# Altium PCB sensors_0v3.PcbDoc
Units mm, origin at the board's own origin, x right, y up, seen from the top; angles counter-clockwise.
Board outline 50 x 100 mm, 2 copper layers (Top Layer, Bottom Layer); 69 components, 59 nets, 299 pads, 123 vias.
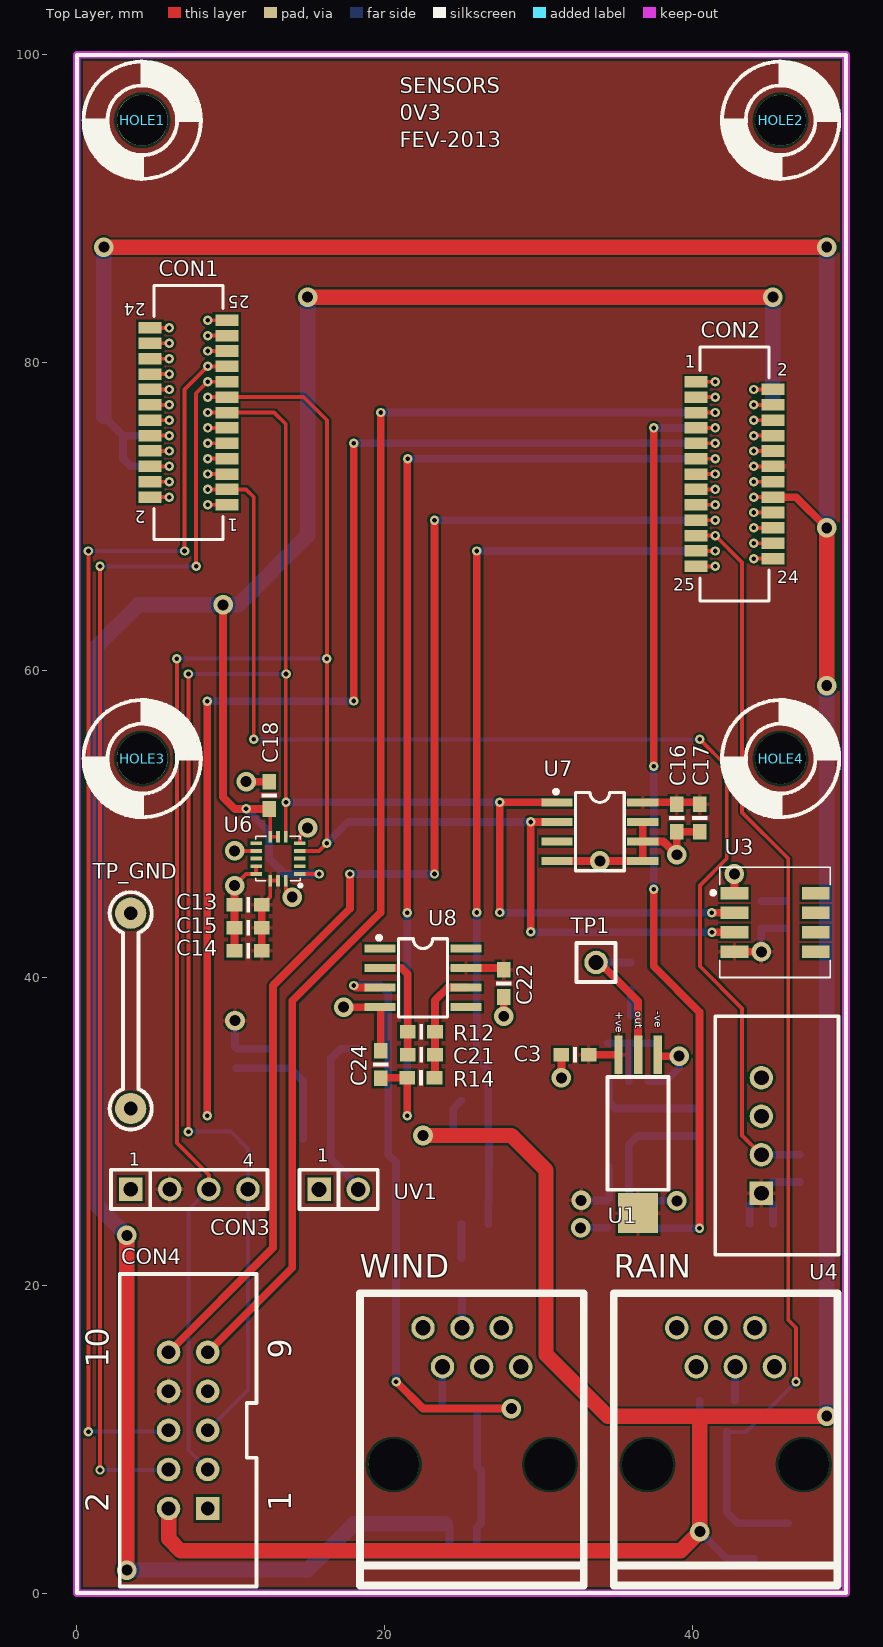
[diagram p0: Top Layer view]
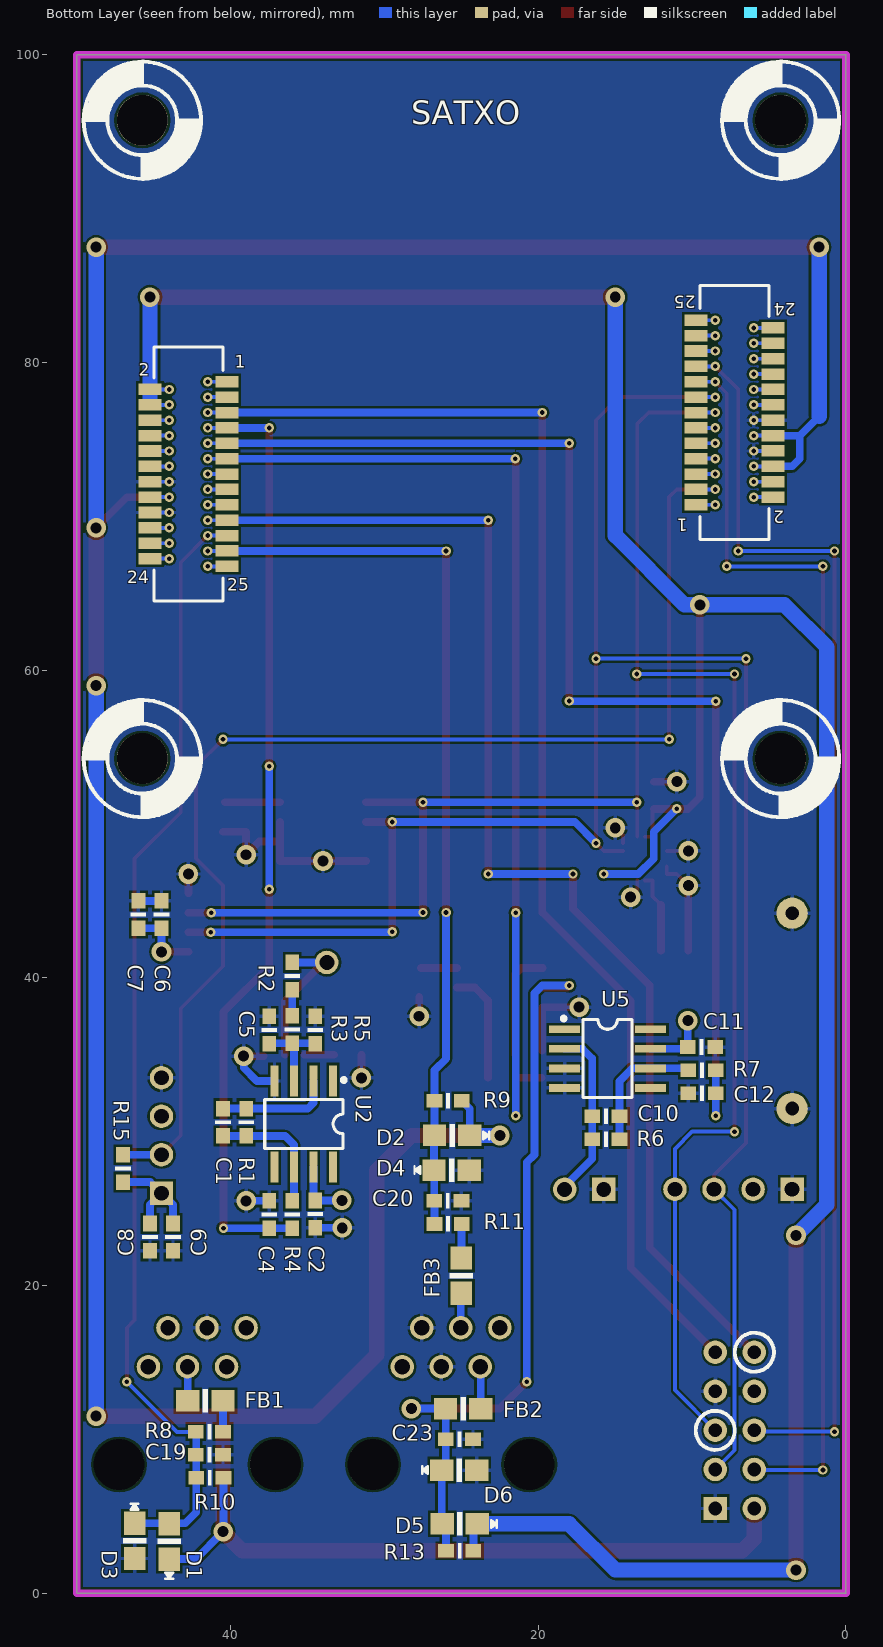
[diagram p1: Bottom Layer view, seen from below]

## Layer stack, top to bottom
Top Layer: signal copper 0.0356
Dielectric: dielectric 0.32, FR-4, Dk 4.8
Bottom Layer: signal copper 0.0356

## Board outline
0,100 0,0 50,0 50,100 0,100

## Design rules (kind name [scope] priority, off if disabled: settings)
Clearance [All] p1: gap=0.152
HoleSize [All] p1: absolutevalues=TRUE maxlimit=2.54 minlimit=0.305 maxpercent=80.000 minpercent=20.000
PolygonConnect [All] p1: connectstyle=Relief reliefconductorwidth=0.254 reliefentries=4 polygonreliefangle="90 Angle"
RoutingVias [All] p1: holewidth=0.508 width=0.762 viastyle="Through Hole" minholewidth=0.305 minwidth=0.61 maxholewidth=0.711 maxwidth=1.27
SilkscreenOverComponentPads [All] p1: minsilkscreentomaskgap=0.254
SolderMaskExpansion [All] p1: expansion=0.102
Width [All] p1: maxlimit=2.54 minlimit=0.152 preferedwidth=0.254
26 further rules are at their usual default settings.

## Classes and differential pairs
component class U_weatherstation: C19 C20 C21 C22 C23 C24 D1 D2 D3 D4 D5 D6 FB1 FB2 FB3 R8 R9 R10 R11 R12 R13 R14 RAIN U8 WIND
component class U_pressure_temp_uv: C10 C11 C12 C13 C14 C15 C16 C17 C18 R6 R7 U5 U6 U7 UV1
component class U_humidity: C1 C2 C3 C4 C5 C6 C7 C8 C9 R1 R2 R3 R4 R5 R15 TP1 U1 U2 U3 U4
component class U_connectors: CON1 CON2 CON3 CON4 HOLE1 HOLE2 HOLE3 HOLE4 TP_GND

## Components (designator, comment, footprint, x,y, rotation, side; value= is the part's Value field where it differs from the comment)
C1 "100pF" 0603 40.5,31.5 r270 bottom
C2 "100nF" 0603 34.5,23.75 r90 bottom
C3 "100nF" 0603 31.5,35 r0 top
C4 "100nF" 0603 37.5,25.5 r270 bottom
C5 "100nF" 0603 37.5,37.5 r270 bottom
C6 "100nF" 0603 44.5,45 r270 bottom
C7 "10nF" 0603 46,45 r270 bottom
C8 "100nF" 0603 45.25,22.25 r90 bottom
C9 "10nF" 0603 43.75,22.25 r90 bottom
C10 "100pF" 0603 16.5,31 r180 bottom
C11 "100nF" 0603 8.5,35.5 r0 bottom
C12 "100nF" 0603 10.25,32.5 r180 bottom
C13 "10nF" 0603 10.25,44.75 r0 top
C14 "1uF" 0603 10.25,41.75 r0 top
C15 "100nF" 0603 10.25,43.25 r0 top
C16 "100nF" 0603 39,49.5 r90 top
C17 "10nF" 0603 40.5,49.5 r90 top
C18 "100nF" 0603 12.5,52.75 r270 top
C19 "10nF" 0603 40.5,9 r0 bottom
C20 "10nF" 0603 25,25.5 r0 bottom
C21 "100pF" 0603 21.5,35 r0 top
C22 "100nF" 0603 27.75,38.75 r90 top
C23 "100pF" 0603 24.25,10 r0 bottom
C24 "100nF" 0603 19.75,35.25 r270 top
CON1 "25P" DF9-25-STACK#1 9.751,70.75 r180 top
CON2 "25P" DF9-25-STACK#2 40.249,78.75 r0 top
CON3 "4P" SIP-4 3.5,26.25 r0 top
CON4 "10P" IDC-10 8.5,5.5 r90 top
D1 "MCL4148" 0805@DIODE 44,4.5 r270 bottom
D2 "MCL4148" 0805@DIODE 26.75,29.75 r180 bottom
D3 "MCL4148" 0805@DIODE 46.25,2.25 r90 bottom
D4 "MCL4148" 0805@DIODE 24.5,27.5 r0 bottom
D5 "MCL4148" 0805@DIODE 26.25,4.5 r180 bottom
D6 "MCL4148" 0805@DIODE 24,8 r0 bottom
FB1 "150Z_100MHz" 0805 40.5,12.5 r0 bottom
FB2 "150Z_100MHz" 0805 23.75,12 r0 bottom
FB3 "150Z_100MHz" 0805 25,19.5 r90 bottom
HOLE1 "HOLE" NPTH-3MM 4.25,95.75 r0 top
HOLE2 "HOLE" NPTH-3MM 45.75,95.75 r0 top
HOLE3 "HOLE" NPTH-3MM 4.25,54.25 r0 top
HOLE4 "HOLE" NPTH-3MM 45.75,54.25 r0 top
R1 "10K" 0603 39,31.5 r270 bottom
R2 "20K" 0603 36,41 r270 bottom
R3 "20K" 0603 36,35.75 r90 bottom
R4 "300R" 0603 36,25.5 r270 bottom
R5 "20K" 0603 34.5,37.5 r270 bottom
R6 "300R" 0603 16.5,29.5 r180 bottom
R7 "300R" 0603 10.25,34 r180 bottom
R8 "200R" 0603 40.5,10.5 r0 bottom
R9 "10K" 0603 26.75,32 r180 bottom
R10 "10K" 0603 42.25,7.5 r180 bottom
R11 "200R" 0603 26.75,24 r180 bottom
R12 "10K" 0603 21.5,36.5 r0 top
R13 "220K" 0603 26,2.75 r180 bottom
R14 "300R" 0603 23.25,33.5 r180 top
R15 "2.2k" 0603 47,28.5 r270 bottom
RAIN "RJ25" RJ25 39,17.25 r0 top
TP1 "Test Point" TERMINAL 33.75,41 r0 top
TP_GND "Test Point" TEST-PROBE2 3.5,31.5 r90 top
U1 "HIH-5031" HIH 37.75,35 r180 top
U2 "MCP6071" SOIC-8 35.25,30.5 r270 bottom
U3 "SHT11" SHT 42.75,45.5 r0 top
U4 "DHT22" DHT22 44.5,26 r90 top
U5 "MCP6V26" SOIC-8 15.5,34.75 r180 bottom
U6 "LPS331AP" HCLGA-16 14.5,46.75 r180 top
U7 "TMP175" SOIC-8 34,49.5 r0 top
U8 "MCP6071" SOIC-8 22.5,40 r0 top
UV1 "2P" SIP-2 15.75,26.25 r0 top
WIND "RJ25" RJ25 22.5,17.25 r0 top

## Footprints (in the part's own frame and the unit in brackets; to place one, negate y for a bottom-side part, rotate by r counter-clockwise, add the part's x,y. Pads: shape width x height; smd on the part's side, far side on the other; paste and mask are expansions set on the pad)
0603 [mil]
  rect 40x35 smd: 1(0,0) 2(70,0)
  silkscreen extent 30,-20 40,20
0805 [mil]
  rect 60x55 smd: 1(0,0) 2(90,0)
  silkscreen extent 38,-30 52,30
0805@DIODE [mil]
  rect 60x55 smd: A(0,0) K(90,0)
  silkscreen extent 38,-30 140,30
DF9-25-STACK#1 [mm] "Hirose DF9 25P CON - STACKED"
  rect 1.5x0.75 smd: 1(0,0) 2(5,-0.5) 3(0,-1) 4(5,-1.5) 5(0,-2) 6(5,-2.5) 7(0,-3) 8(5,-3.5) 9(0,-4) 10(5,-4.5) 11(0,-5) 12(5,-5.5) 13(0,-6) 14(5,-6.5) 15(0,-7) 16(5,-7.5) 17(0,-8) 18(5,-8.5) 19(0,-9) 20(5,-9.5) 21(0,-10) 22(5,-10.5) 23(0,-11) 24(5,-11.5) 25(0,-12)
  rect 1.5x0.75 smd far side: 1(0,0) 2(5,-0.5) 3(0,-1) 4(5,-1.5) 5(0,-2) 6(5,-2.5) 7(0,-3) 8(5,-3.5) 9(0,-4) 10(5,-4.5) 11(0,-5) 12(5,-5.5) 13(0,-6) 14(5,-6.5) 15(0,-7) 16(5,-7.5) 17(0,-8) 18(5,-8.5) 19(0,-9) 20(5,-9.5) 21(0,-10) 22(5,-10.5) 23(0,-11) 24(5,-11.5) 25(0,-12)
  Top Layer lines w0.25: 5,-0.5 3.75,-0.5 ; 5,-1.5 3.75,-1.5 ; 5,-2.5 3.75,-2.5 ; 5,-3.5 3.75,-3.5 ; 5,-4.5 3.75,-4.5 ; 5,-5.5 3.75,-5.5 ; 5,-6.5 3.75,-6.5 ; 5,-7.5 3.75,-7.5 ; 5,-8.5 3.75,-8.5 ; 5,-9.5 3.75,-9.5 ; 5,-10.5 3.75,-10.5 ; 5,-11.5 3.75,-11.5 ; 1.25,0 0,0 ; 1.25,-1 0,-1 ; 1.25,-2 0,-2 ; 1.25,-3 0,-3 ; 1.25,-4 0,-4 ; 1.25,-5 0,-5 ; 1.25,-6 0,-6 ; 1.25,-7 0,-7 ; 1.25,-8 0,-8 ; 1.25,-9 0,-9 ; 1.25,-10 0,-10 ; 1.25,-11 0,-11 ; 1.25,-12 0,-12
  Bottom Layer lines w0.25: 5,-0.5 3.751,-0.5 ; 5,-1.5 3.75,-1.5 ; 5,-2.5 3.75,-2.5 ; 5,-3.5 3.75,-3.5 ; 5,-4.5 3.75,-4.5 ; 5,-5.5 3.75,-5.5 ; 5,-6.5 3.75,-6.5 ; 5,-7.5 3.75,-7.5 ; 5,-8.5 3.75,-8.5 ; 5,-9.5 3.75,-9.5 ; 5,-10.5 3.75,-10.5 ; 5,-11.5 3.75,-11.5 ; 1.25,0 0,0 ; 1.25,-1 0,-1 ; 1.25,-2 0,-2 ; 1.25,-3 0,-3 ; 1.25,-4 0,-4 ; 1.25,-5 0,-5 ; 1.25,-6 0,-6 ; 1.25,-7 0,-7 ; 1.25,-8 0,-8 ; 1.25,-9 0,-9 ; 1.25,-10 0,-10 ; 1.25,-11 0,-11 ; 1.25,-12 0,-12 ; 3.751,-0.5 3.75,-0.5
  silkscreen extent 0.25,-14.25 4.75,2.25
DF9-25-STACK#2 [mm] "Hirose DF9 25P CON - STACKED"
  rect 1.5x0.75 smd: 1(0,0) 2(5,-0.5) 3(0,-1) 4(5,-1.5) 5(0,-2) 6(5,-2.5) 7(0,-3) 8(5,-3.5) 9(0,-4) 10(5,-4.5) 11(0,-5) 12(5,-5.5) 13(0,-6) 14(5,-6.5) 15(0,-7) 16(5,-7.5) 17(0,-8) 18(5,-8.5) 19(0,-9) 20(5,-9.5) 21(0,-10) 22(5,-10.5) 23(0,-11) 24(5,-11.5) 25(0,-12)
  rect 1.5x0.75 smd far side: 1(0,0) 2(5,-0.5) 3(0,-1) 4(5,-1.5) 5(0,-2) 6(5,-2.5) 7(0,-3) 8(5,-3.5) 9(0,-4) 10(5,-4.5) 11(0,-5) 12(5,-5.5) 13(0,-6) 14(5,-6.5) 15(0,-7) 16(5,-7.5) 17(0,-8) 18(5,-8.5) 19(0,-9) 20(5,-9.5) 21(0,-10) 22(5,-10.5) 23(0,-11) 24(5,-11.5) 25(0,-12)
  Top Layer lines w0.25: 0,-12 1.25,-12 ; 0,-11 1.25,-11 ; 0,-10 1.25,-10 ; 0,-9 1.25,-9 ; 0,-8 1.25,-8 ; 0,-7 1.25,-7 ; 0,-6 1.25,-6 ; 0,-5 1.25,-5 ; 0,-4 1.25,-4 ; 0,-3 1.25,-3 ; 0,-2 1.25,-2 ; 0,-1 1.25,-1 ; 0,0 1.25,0 ; 3.75,-11.5 5,-11.5 ; 3.75,-10.5 5,-10.5 ; 3.75,-9.5 5,-9.5 ; 3.75,-8.5 5,-8.5 ; 3.75,-7.5 5,-7.5 ; 3.75,-6.5 5,-6.5 ; 3.75,-5.5 5,-5.5 ; 3.75,-4.5 5,-4.5 ; 3.75,-3.5 5,-3.5 ; 3.75,-2.5 5,-2.5 ; 3.75,-1.5 5,-1.5 ; 3.75,-0.5 5,-0.5
  Bottom Layer lines w0.25: 0,-12 1.25,-12 ; 0,-11 1.25,-11 ; 0,-10 1.25,-10 ; 0,-9 1.25,-9 ; 0,-8 1.25,-8 ; 0,-7 1.25,-7 ; 0,-6 1.25,-6 ; 0,-5 1.25,-5 ; 0,-4 1.25,-4 ; 0,-3 1.25,-3 ; 0,-2 1.25,-2 ; 0,-1 1.25,-1 ; 0,0 1.25,0 ; 3.75,-11.5 5,-11.5 ; 3.75,-10.5 5,-10.5 ; 3.75,-9.5 5,-9.5 ; 3.75,-8.5 5,-8.5 ; 3.75,-7.5 5,-7.5 ; 3.75,-6.5 5,-6.5 ; 3.75,-5.5 5,-5.5 ; 3.75,-4.5 5,-4.5 ; 3.75,-3.5 5,-3.5 ; 3.75,-2.5 5,-2.5 ; 3.75,-1.5 5,-1.5 ; 3.75,-0.5 5,-0.5
  silkscreen extent 0.25,-14.25 4.75,2.25
DHT22 [mil] "DHT22 humidity sensor footprint"
  rect 60x60 hole 38: 1(0,0)
  round 60 hole 38: 2(98.43,0) 3(196.85,0) 4(295.28,0)
  silkscreen extent -157,-197 453,118
HCLGA-16 [mm]
  rect 0.75x0.25 smd: 1(0,0) 2(0,-0.5) 3(0,-1) 4(0,-1.5) 5(0,-2) 9(2.85,-2) 10(2.85,-1.5) 11(2.85,-1) 12(2.85,-0.5) 13(2.85,0)
  rect 0.25x0.75 smd: 6(0.925,-2.425) 7(1.425,-2.425) 8(1.925,-2.425) 14(1.925,0.425) 15(1.425,0.425) 16(0.925,0.425)
  silkscreen extent -0.13,-2.45 2.88,0.85
HIH [mm] "Honeywell Humidity Sensor"
  rect 0.55x2.5 smd: 1(0,0) 2(1.27,0) 3(2.54,0)
  rect 2.6x2.6 smd: PAD(1.27,10.3)
  silkscreen extent -0.7,1.45 3.25,8.77
IDC-10 [mil]
  rect 60x60 hole 35: 1(0,0)
  round 60 hole 35: 2(0,100) 3(100,0) 4(100,100) 5(200,0) 6(200,100) 7(300,0) 8(300,100) 9(400,0) 10(400,100)
  silkscreen extent -200,-125 600,225
NPTH-3MM [mil]
  round 130 hole 130 unplated: 1(0,0)
  silkscreen extent -150,-150 150,150
RJ25 [mm]
  round 1.524 hole 1: 1(0,0) 2(1.27,-2.54) 3(2.54,0) 4(3.81,-2.54) 5(5.08,0) 6(6.35,-2.54)
  round 3.25 hole 3.3: ""(-1.905,-8.89) ""(8.255,-8.89)
  silkscreen extent -4.1,-16.76 10.45,2.24
SHT [mm] "Sensirion SHTx Humidity Sensor Footprint"
  rect 1.8x0.8 smd: 1(0,0.005) 2(0,-1.27) 3(0,-2.54) 4(0,-3.81) 5(5.28,-3.81) 6(5.28,-2.54) 7(5.28,-1.27) 8(5.28,0.005)
  silkscreen extent -1.51,-5.48 6.23,1.68
SIP-2 [mil]
  rect 60x60 hole 38: 1(0,0)
  round 60 hole 38: 2(100,0)
  silkscreen extent -50,-50 150,50
SIP-4 [mil]
  rect 60x60 hole 38: 1(0,0)
  round 60 hole 38: 2(100,0) 3(200,0) 4(300,0)
  silkscreen extent -50,-50 350,50
SOIC-8 [mil] "Small Outline 8 leads Body Size 150mils"
  rect 80x20 smd: 1(-110,75) 2(-110,25) 3(-110,-25) 4(-110,-75) 5(110,-75) 6(110,-25) 7(110,25) 8(110,75)
  silkscreen extent -117,-100 63,107
TERMINAL [mil]
  round 60 hole 37.99: 1(0,0)
  silkscreen extent -50,-50 50,50
TEST-PROBE2 [mil]
  round 80 hole 35: 1(0,0) 1(500,0)
  silkscreen extent -54,-54 554,54

## Part data
C1 C2 C3 C4 C5 C6 C7 C8 C9 C10 C11 C12 C13 C14 C15 C16 C17 C18 C19 C20 C21 C22 C23 C24: library part CAP, "Capacitor"
CON1 CON2: library part CON25, "Connector 25 Pins"
CON3: library part CON04, "Connector 4 pins"
CON4: library part CON10, "Connector 10 Pins"
D1 D2 D3 D4 D5 D6: library part Diode, "Vishay Standard Avalanche Sinterglass Diode"
FB1 FB2 FB3: library part FERRITE-BEAD-AXIAL, "Ferrite bead"
HOLE1 HOLE2 HOLE3 HOLE4: library part "PCB HOLE", "PCB Fixation Hole M3"
R1 R2 R3 R4 R5 R6 R7 R8 R9 R10 R11 R12 R13 R14 R15: library part RES, "Resistor"
RAIN WIND: "RJ25 Connector"
TP1 TP_GND: library part TEST-PROBE, "Test/Probe Point"
U1: "Low Voltage Humidity Sensor"
U2 U8: library part MCP6V26, "Low-Offset Opamp"
U3 U4: "Digital Humidity and Temperature Sensor"
U5: "Low-Offset Opamp"
U6: "Pressure sensor, 260 - 1260 mbar"
U7: "Digital Temperature Sensor"
UV1: library part JMP2, "2-pin Jumper"

## Via types
v1: diameter 0.61, hole 0.305, Top Layer to Bottom Layer, 93 vias
v2: diameter 1.27, hole 0.711, Top Layer to Bottom Layer, 30 vias

## Nets (pads, with @x,y where several pads share a name; then routed paths per layer and width w, separated by ;. In a path a pad name is that pad's centre, name@x,y a point inside that pad or via, vN(x,y) a via of type N, cw(c..) or ccw(c..) an arc to the next point about the centre after c; other vN are vias at no path point)
1WIRE: CON1.3 R15.1 U4.2 | length 79.3
  Top Layer w0.25: CON1.3@9.751,71.75 11,71.75 11.5,71.25 v1(11.5,55.5) ; v1(40.5,55.5) 42.25,53.75 42.25,47.75 40.5,46 40.5,40.75 43.25,38 43.25,29.75 U4.2
  Bottom Layer w0.25: v1(11.5,55.5) v1(40.5,55.5)
  Bottom Layer w0.5: U4.2 R15.1@47,28.5
  other v1: 8.501,71.75
1WIRE_SN: CON1.1
  other v1: 8.501,70.75
A3V3: C2.2 C3.2 C6.2 C7.2 C8.2 C9.2 C11.2 C13.2 C14.2 C15.2 C16.2 C17.2 C22.2 CON2.12 CON3.2 CON4.8 R15.2 U1.3 U1.PAD U2.7 U3.4 U4.1 U5.7 U6.14 U6.15 U7.8 U8.7 | length 33.1
  Top Layer w0.25: C13.2 12.575,45.298 U6.14 U6.15
  Top Layer w0.5: C14.2 C13.2 ; U8.7 C22.2@27.643,40.635 ; C3.2 U1.3 ; U7.8 C17.2@40.373,51.405 ; U3.4 v2(44.5,41.69)
  Bottom Layer w0.5: C11.2 v2(10.278,37.222) ; C11.2@10.393,35.385 U5.7 ; v2(32.778,25.528) C2.2 ; C2.2@34.615,25.643 U2.7 ; C9.2 43.75,25.25 U4.1 ; v2@44.5,41.69 C6.2 C7.2 ; C8.2 45.25,25.25 U4.1 ; R15.2 45.222,26.722 U4.1
  other v1: 43.999,73.25
D3V3: CON1.6 CON1.10 CON2.16 CON4.2 D1.K D2.K R9.2 R10.2 | length 243.2
  Top Layer w0.5: CON2.16@45.249,71.25 46.75,71.25 v2(48.75,69.25)
  Top Layer w1: v2(1.75,87.5) v2(48.75,87.5) ; CON4.2 5.96,3.54 6.75,2.75 39.25,2.75 v2(40.5,4) 40.5,11.5 ; v2(22.5,29.75) 28.25,29.75 30.5,27.5 30.5,15.5 34.5,11.5 40.5,11.5 ; v2(48.75,11.5) 40.5,11.5 ; v2(48.75,59) v2(48.75,69.25)
  Bottom Layer w0.5: 1.75,76.5 3,75.25 ; CON1.6@4.751,73.25 3.5,73.25 3,73.75 3,75.25 ; CON1.10@4.751,75.25 3,75.25 ; D2.K 24.464,31.492 R9.2 ; R10.2 40.472,4.028 v2(40.5,4) 42.286,2.214 D1.K
  Bottom Layer w1: 1.75,76.5 v2(1.75,87.5) ; v2(22.5,29.75) D2.K ; v2(48.75,11.5) v2(48.75,59) ; v2(48.75,69.25) v2(48.75,87.5)
  other v1: 43.999,71.25 6.001,73.25 6.001,75.25
EXP_ADC: CON2.5 CON4.9 | length 86.2
  Top Layer w0.5: CON4.9 14,21.16 14,38.5 19.75,44.25 v1(19.75,76.75)
  Bottom Layer w0.5: v1(19.75,76.75) CON2.5@40.249,76.75
  other v1: 41.499,76.75
EXP_GPIO1: CON1.19 CON4.6 | length 81.3
  Top Layer w0.25: v1(0.75,10.5) v1(0.75,67.75) ; v1(7,67.75) 7,78.249 v1(8.501,79.75)
  Bottom Layer w0.25: v1(0.75,10.5) CON4.6@5.88,10.5 ; v1(0.75,67.75) v1(7,67.75)
EXP_GPIO2: CON1.17 CON4.4 | length 81.7
  Top Layer w0.25: v1(1.5,8) v1(1.5,66.75) ; v1(7.75,66.75) 7.75,77.999 v1(8.501,78.75)
  Bottom Layer w0.25: v1(1.5,8) CON4.4@5.92,8 ; v1(1.5,66.75) v1(7.75,66.75)
EXP_INT: CON2.19 CON4.10 | length 81.5
  Top Layer w0.5: CON4.10 12.75,22.45 12.75,39.5 17.75,44.5 v1(17.75,46.75) ; v1(23.25,46.75) v1(23.25,69.75)
  Bottom Layer w0.5: v1(17.75,46.75) v1(23.25,46.75) ; v1(23.25,69.75) CON2.19@40.249,69.75
  other v1: 41.499,69.75
GND: C2.1 C3.1 C4.1 C5.1 C6.1 C7.1 C8.1 C9.1 C11.1 C12.1 C13.1 C14.1 C15.1 C16.1 C17.1 C18.1 C19.1 C20.1 C22.1 C23.1 C24.1 CON1.8 CON1.12 CON2.14 CON2.18 CON3.1 CON4.1 CON4.7 D3.A D4.A D6.A R5.1 RAIN.3 TP_GND.1 U1.1 U2.4 U3.1 U4.4 U5.3 U5.4 U6.5 U6.10 U6.12 U6.13 U6.16 U7.4 U7.5 U7.6 U7.7 U8.4 UV1.1 WIND.4 WIND.5 | length 43.8
  Top Layer w0.25: v2(10.25,46) 11,46.75 U6.13 U6.12 ; v2(10.25,48.25) U6.10 ; U6.16 13.575,45.675 v2(14,45.25) ; U6.5 14.5,49.25 v2(15,49.75)
  Top Layer w0.5: C14.1 C15.1 C13.1 v2(10.25,46) ; v2(11,52.75) C18.1 ; v2(17.345,38.095) U8.4 ; C24.1 U8.4@19.75,38.05 ; v2(27.75,37.5) C22.1 ; U7.4 v2(34,47.595) U7.5 U7.6 ; v2(31.5,33.5) C3.1 ; U7.7 U7.6 ; U1.1@37.845,34.905 v2(39.155,34.905) ; C17.1 C16.1 v2(39,48) 38.135,48.865 U7.6 ; U3.1 v2(42.75,46.75)
  Bottom Layer w0.5: v2(32.75,23.75) C2.1 ; U2.4 38.294,33.294 39.155,34.155 v2(39.155,34.905) ; C4.1 v2(39,25.5) ; C6.1 C7.1
  other v1: 43.999,70.25 43.999,72.25 6.001,74.25 6.001,76.25
IO3V3: C18.2 CON2.2 CON2.4 D5.K R13.2 U6.1 U6.7 U6.8 | length 180.4
  Top Layer w0.25: C18.2@12.575,50.897 U6.8 U6.7 ; U6.1 v1(15.75,46.75)
  Top Layer w0.5: v2(9.5,64.25) 9.5,51.75 10.278,50.972 C18.2
  Top Layer w1: v2(3.25,1.5) v2(3.25,23.25) ; v2(15,84.25) v2(45.25,84.25)
  Bottom Layer w0.5: v1(11,51) 12.5,49.5 12.5,47.75 13.5,46.75 v1(15.75,46.75) ; R13.2 D5.K@24.222,4.242
  Bottom Layer w1: v2(3.25,1.5) 15,1.5 18,4.5 D5.K ; v2(3.25,23.25) 1.25,25.25 1.25,61.5 4,64.25 v2(9.5,64.25) 10.5,64.25 15,68.75 v2(15,84.25) ; CON2.4@45.25,77.5 v2(45.25,84.25)
  other v1: 43.999,77.25 43.999,78.25
NetC1_1: C1.1 R1.1 U2.2 | length 7.5
  Bottom Layer w0.5: U2.2 34.615,31.885 35,31.5 C1.1
NetC1_2: C1.2 R1.2 R4.1 U2.6 | length 8.5
  Bottom Layer w0.5: R4.1 35.885,25.615 U2.6 35.885,29.135 36.472,29.722 C1.2
NetC4_2: C4.2 CON2.7 R4.2 | length 60.5
  Top Layer w0.5: v1(37.5,45.75) 37.5,40.75 40.472,37.778 v1(40.472,23.722) ; v1(37.5,53.75) v1(37.5,75.75)
  Bottom Layer w0.5: R4.2 C4.2 v1(40.472,23.722) ; v1(37.5,45.75) v1(37.5,53.75) ; v1(37.5,75.75) CON2.7@40.249,75.75
  other v1: 41.499,75.75
NetC5_2: C5.2 R3.1 R5.2 U2.3 | length 5.3
  Bottom Layer w0.5: R5.2@34.528,35.75 R3.1 C5.2@37.473,35.75 ; U2.3 R3.1@35.885,35.635
NetC10_1: C10.1 R6.1 U5.2 UV1.2 | length 11.3
  Bottom Layer w0.5: UV1.2 18.29,26.46 16.5,28.25 R6.1 16.5,34.75 17.135,35.385 U5.2
NetC10_2: C10.2 R6.2 R7.1 U5.6 | length 8.5
  Bottom Layer w0.5: R7.1@10.365,34.115 U5.6 13.885,34.115 14.722,33.278 R6.2
NetC12_2: C12.2 CON2.9 R7.2 | length 78.4
  Top Layer w0.5: v1(8.472,31.028) v1(8.472,57.972) ; v1(18,58) v1(18,74.75)
  Bottom Layer w0.5: v1(8.472,31.028) C12.2 R7.2 ; v1(8.472,57.972) v1@17.972,57.972 ; v1(18,74.75) CON2.9@40.249,74.75
  other v1: 41.499,74.75
NetC19_2: C19.2 CON2.21 D1.A D3.K R8.2 R10.1 | length 72.5
  Top Layer w0.25: v1(41.499,68.75) 43.25,66.999 43.25,50.75 46.25,47.75 46.25,17.75 46.75,17.25 v1(46.75,13.75)
  Bottom Layer w0.25: R8.2@42.25,10.473 43.5,10.473 v1@46.75,13.723
  Bottom Layer w0.5: R8.2@42.25,10.473 R10.1 42.25,5.25 42.964,4.536 D3.K
NetC20_2: C20.2 CON2.23 D2.A D4.K R9.1 R11.1 | length 58.3
  Top Layer w0.5: v1(26,44.25) v1(26,67.75)
  Bottom Layer w0.5: v1(26,44.25) 26,34.75 26.75,34 R9.1 D2.A ; v1(26,67.75) CON2.23@40.249,67.75 ; R11.1 26.75,25.472 C20.2 D4.K@26.778,27.492 ; D4.K D2.A@26.786,29.715
  other v1: 41.499,67.75
NetC21_1: C21.1 R12.1 U8.2 | length 7.2
  Top Layer w0.5: U8.2 21.115,40.635 21.5,40.25 C21.1
NetC21_2: C21.2 R12.2 R14.1 U8.6 | length 7.4
  Top Layer w0.5: R14.1@23.278,33.5 23.278,38.528 24.115,39.365 U8.6
NetC23_2: C23.2 D5.A D6.K FB2.2 R13.1 U8.3 | length 49.6
  Top Layer w0.5: v1(18,39.5) 18.135,39.365 U8.3 ; v1(20.75,13.75) 22.5,12 v2(28.25,12)
  Bottom Layer w0.5: v1(18,39.5) 19.75,39.5 20.25,39 20.25,28.5 20.75,28 v1(20.75,13.75) ; R13.1 26,4.25 D5.A 26.286,4.536 D6.K 26.028,8.258 C23.2 FB2.2@26.028,11.992 ; FB2.2 v2(28.25,12)
NetC24_2: C24.2 CON2.11 R14.2 | length 65.6
  Top Layer w0.5: C24.2@19.778,33.5 R14.2 v1(21.472,31.028) ; v1(21.472,44.222) v1@21.472,73.722
  Bottom Layer w0.5: v1(21.472,31.028) v1(21.472,44.222) ; v1(21.5,73.75) CON2.11@40.249,73.75
  other v1: 41.499,73.75
NetFB1_1: FB1.1 R8.1 | length 2
  Bottom Layer w0.5: R8.1 FB1.1@40.5,12.5
NetFB1_2: FB1.2 RAIN.4 | length 2.2
  Bottom Layer w0.5: FB1.2 RAIN.4@42.786,14.686
NetFB2_1: FB2.1 WIND.2 | length 2.7
  Bottom Layer w0.5: FB2.1 WIND.2@23.75,14.69
NetFB3_1: FB3.1 WIND.3 | length 2.2
  Bottom Layer w0.5: WIND.3 FB3.1@25.04,19.461
NetFB3_2: FB3.2 R11.2 | length 2.2
  Bottom Layer w0.5: FB3.2 R11.2@25,23.972
NetR2_1: R2.1 TP1.1 U1.2 | length 9.5
  Top Layer w0.5: TP1.1 33.961,41 36.48,38.481 U1.2
  Bottom Layer w0.5: TP1.1 R2.1
NetR2_2: R2.2 R3.2 | length 1.7
  Bottom Layer w0.5: R3.2 R2.2
PB0: CON1.4
  other v1: 6.001,72.25
PB4: CON1.2
  other v1: 6.001,71.25
PD4: CON1.7
  other v1: 8.501,73.75
PD5: CON1.5
  other v1: 8.501,72.75
PE2: CON2.20
  other v1: 43.999,69.25
PE3: CON2.25
  other v1: 41.499,66.75
PE7: CON2.17
  other v1: 41.499,70.75
PF0: CON2.15
  other v1: 41.499,71.75
PF1: CON2.13
  other v1: 41.499,72.75
PF6: CON2.3
  other v1: 41.499,77.75
PF7: CON2.1
  other v1: 41.499,78.75
PG0: CON1.23
  other v1: 8.501,81.75
PG1: CON1.21
  other v1: 8.501,80.75
RSTZ: CON1.25
  other v1: 8.501,82.75
SCL: CON1.15 CON3.3 CON4.3 U3.3 U6.4 U7.2 | length 136.9
  Top Layer w0.25: v1(6.5,60.75) 6.5,29.25 8.58,27.17 CON3.3 ; CON1.15@9.751,77.75 14.75,77.75 16.25,76.25 v1(16.25,60.75) v1(16.25,48.75) 15.75,48.25 U6.4
  Top Layer w0.5: v1(29.5,43) v1(29.5,50.135) U7.2 ; v1(41.29,42.96) U3.3
  Bottom Layer w0.25: v1(6.5,60.75) v1(16.25,60.75) ; CON4.3 7.25,9.29 7.25,24.92 CON3.3
  Bottom Layer w0.5: v1(16.25,48.75) 17.635,50.135 v1(29.5,50.135) ; v1@29.5,42.96 v1(41.29,42.96)
  other v1: 8.501,77.75
SDA: CON1.13 CON3.4 CON4.5 U3.2 U6.6 U7.1 | length 130.8
  Top Layer w0.25: v1(7.25,30) v1(7.25,59.75) ; CON1.13@9.751,76.75 12.825,76.75 13.575,76 U6.6
  Top Layer w0.5: v1(27.5,44.25) v1(27.5,51.405) U7.1 ; v1(41.27,44.23) U3.2
  Bottom Layer w0.25: v1(7.25,30) 10,30 11.12,28.88 CON3.4 11.12,13.2 CON4.5 ; v1(7.25,59.75) v1(13.6,59.75)
  Bottom Layer w0.5: v1(13.595,51.405) v1(27.5,51.405) ; v1(27.5,44.25) 27.52,44.23 v1(41.27,44.23)
  other v1: 8.501,76.75
STACK_BUS1: CON1.14
  other v1: 6.001,77.25
STACK_BUS2: CON1.16
  other v1: 6.001,78.25
STACK_BUS3: CON1.18
  other v1: 6.001,79.25
STACK_BUS4: CON1.20
  other v1: 6.001,80.25
STACK_BUS5: CON1.22
  other v1: 6.001,81.25
STACK_BUS6: CON1.24
  other v1: 6.001,82.25
STACK_BUS9: CON2.6
  other v1: 43.999,76.25
STACK_BUS10: CON2.8
  other v1: 43.999,75.25
STACK_BUS11: CON2.10
  other v1: 43.999,74.25
UART0_RX: CON2.24
  other v1: 43.999,67.25
UART0_TX: CON2.22
  other v1: 43.999,68.25
UART1_RX: CON1.11
  other v1: 8.501,75.75
UART1_TX: CON1.9
  other v1: 8.501,74.75
pads on no net: HOLE1.1 HOLE2.1 HOLE3.1 HOLE4.1 RAIN. RAIN.1 RAIN.2 RAIN.5 RAIN.6 U2.1 U2.5 U2.8 U3.5 U3.6 U3.7 U3.8 U4.3 U5.1 U5.5 U5.8 U6.2 U6.3 U6.9 U6.11 U7.3 U8.1 U8.5 U8.8 WIND. WIND.1 WIND.6

## Polygon pours and split planes (outlines as drawn)
GND on Bottom Layer "GND" (solid, pour order 2): 0,0 0,100 50,100 50,0 0,0
A3V3 on Top Layer "A3V3" (solid, pour order 4): 0,0 0,100 50,100 50,0 0,0

## Keep-outs
Keep-Out Layer:
  lines w0.5: 0,0 0,75 0,100 50,100 50,0 0,0

## Silkscreen, mask and mechanical layers (free items; w line width, h text height)
Top Overlay:
  the board outline again, w0.254
  text "SENSORS" at 21,97.5 h1
  text "0V3" at 21,95.75 h1
  text "FEV-2013" at 21,94 h1
Bottom Overlay:
  text "SATXO" at 28.25,95.5 h1.52

## Text inside footprints (layer, text, board x,y; h text height)
CON1: Top Overlay "25" at 11.226,84.35 h0.8 r180; Top Overlay "24" at 4.476,83.85 h0.8 r180; Top Overlay "2" at 4.476,70.35 h0.8 r180; Top Overlay "1" at 10.476,69.85 h0.8 r180; Bottom Overlay "1" at 10.276,69.85 h0.8 r180; Bottom Overlay "2" at 4.026,70.35 h0.8 r180; Bottom Overlay "25" at 9.776,84.35 h0.8 r180; Bottom Overlay "24" at 3.276,83.85 h0.8 r180
CON2: Top Overlay "25" at 38.774,65.15 h0.8; Top Overlay "24" at 45.524,65.65 h0.8; Top Overlay "2" at 45.524,79.15 h0.8; Top Overlay "1" at 39.524,79.65 h0.8; Bottom Overlay "1" at 39.724,79.65 h0.8; Bottom Overlay "2" at 45.974,79.15 h0.8; Bottom Overlay "25" at 40.224,65.15 h0.8; Bottom Overlay "24" at 46.724,65.65 h0.8
CON3: Top Overlay "1" at 3.373,27.774 h0.86; Top Overlay "4" at 10.79,27.723 h0.86
CON4: Top Overlay "1" at 13.925,5.325 h1.5 r90; Top Overlay "2" at 2.075,5.25 h1.5 r90; Top Overlay "10" at 2.075,14.65 h1.5 r90; Top Overlay "9" at 13.95,15.225 h1.5 r90
U1: Top Overlay "out" at 36.3,37.825 h0.5 r270; Top Overlay "+ve" at 35.025,37.825 h0.5 r270; Top Overlay "-ve" at 37.575,37.825 h0.5 r270
UV1: Top Overlay "1" at 15.623,28.028 h0.86